# Altium PCB NEO9M.PcbDoc
Units mm, origin at the board's own origin, x right, y up, seen from the top; angles counter-clockwise.
Board outline 46.5 x 32 mm, 4 copper layers (Top Layer, Mid Layer 1, Mid Layer 2, Bottom Layer), stack 1.57 mm thick; 27 components, 26 nets, 108 pads, 18 vias.
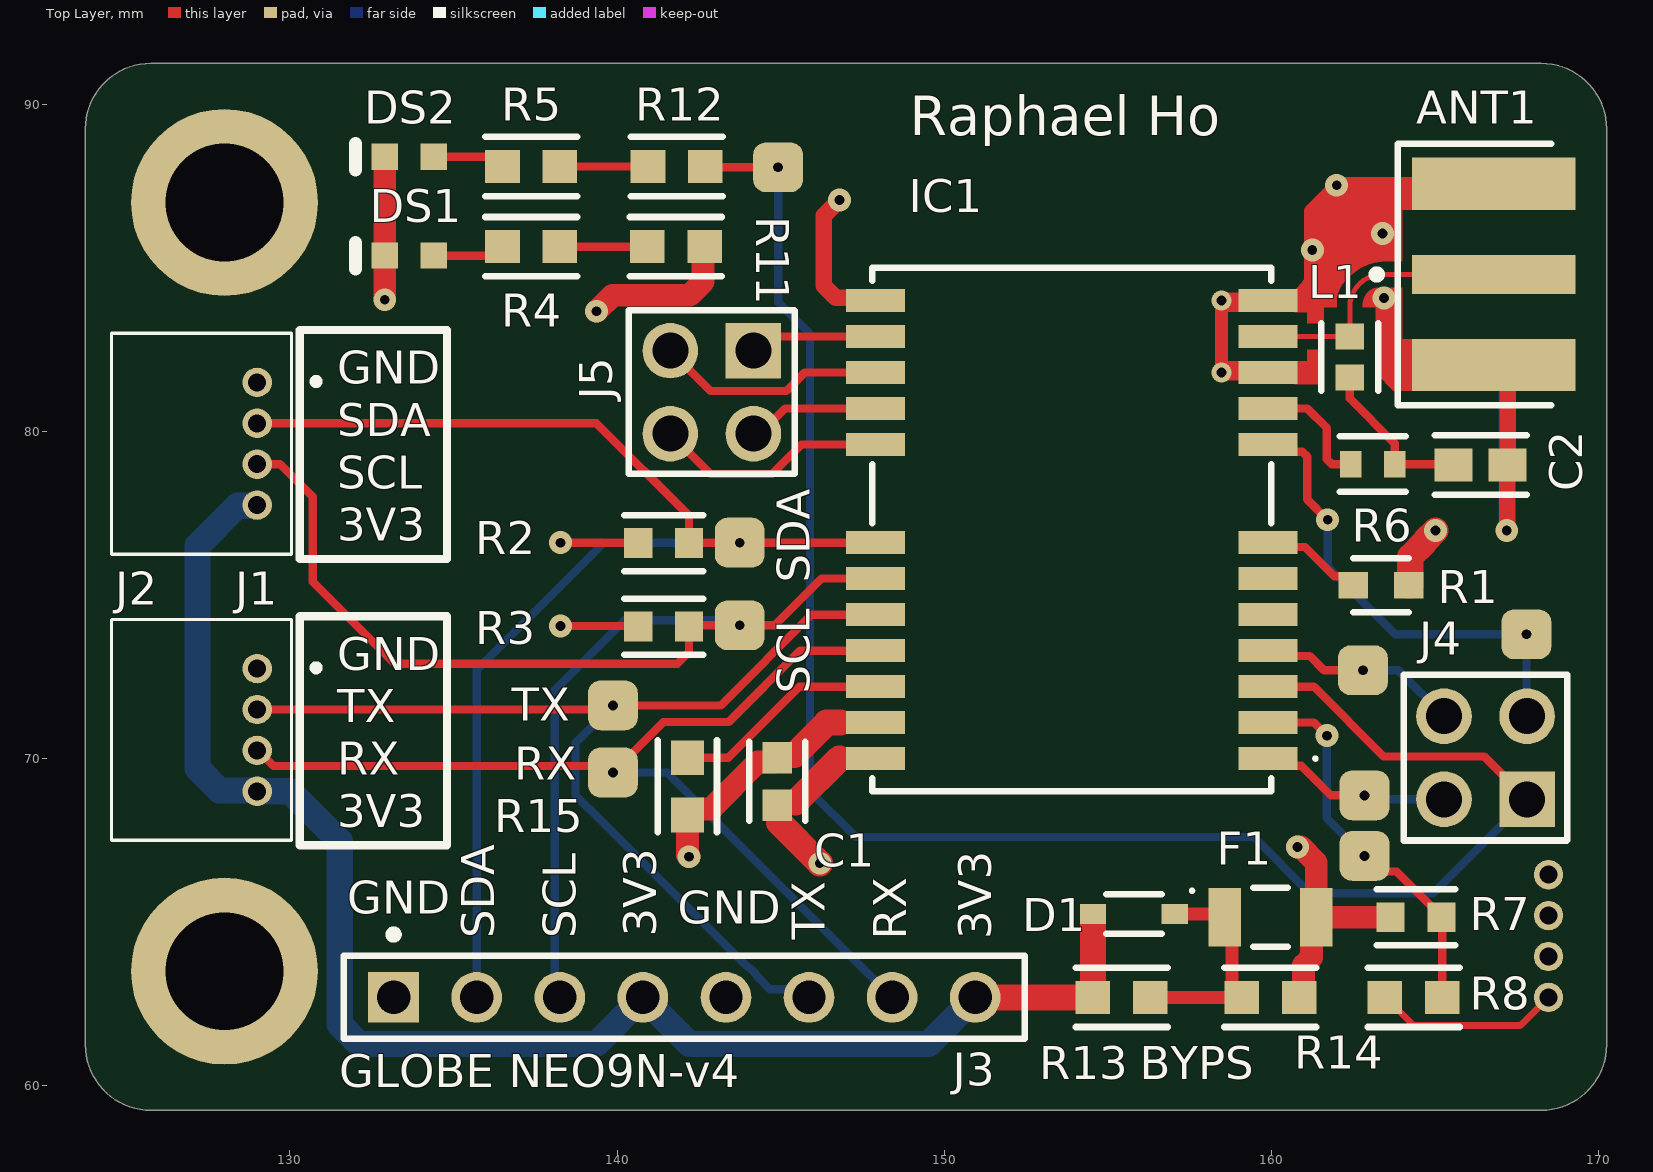
[diagram p0: Top Layer view]
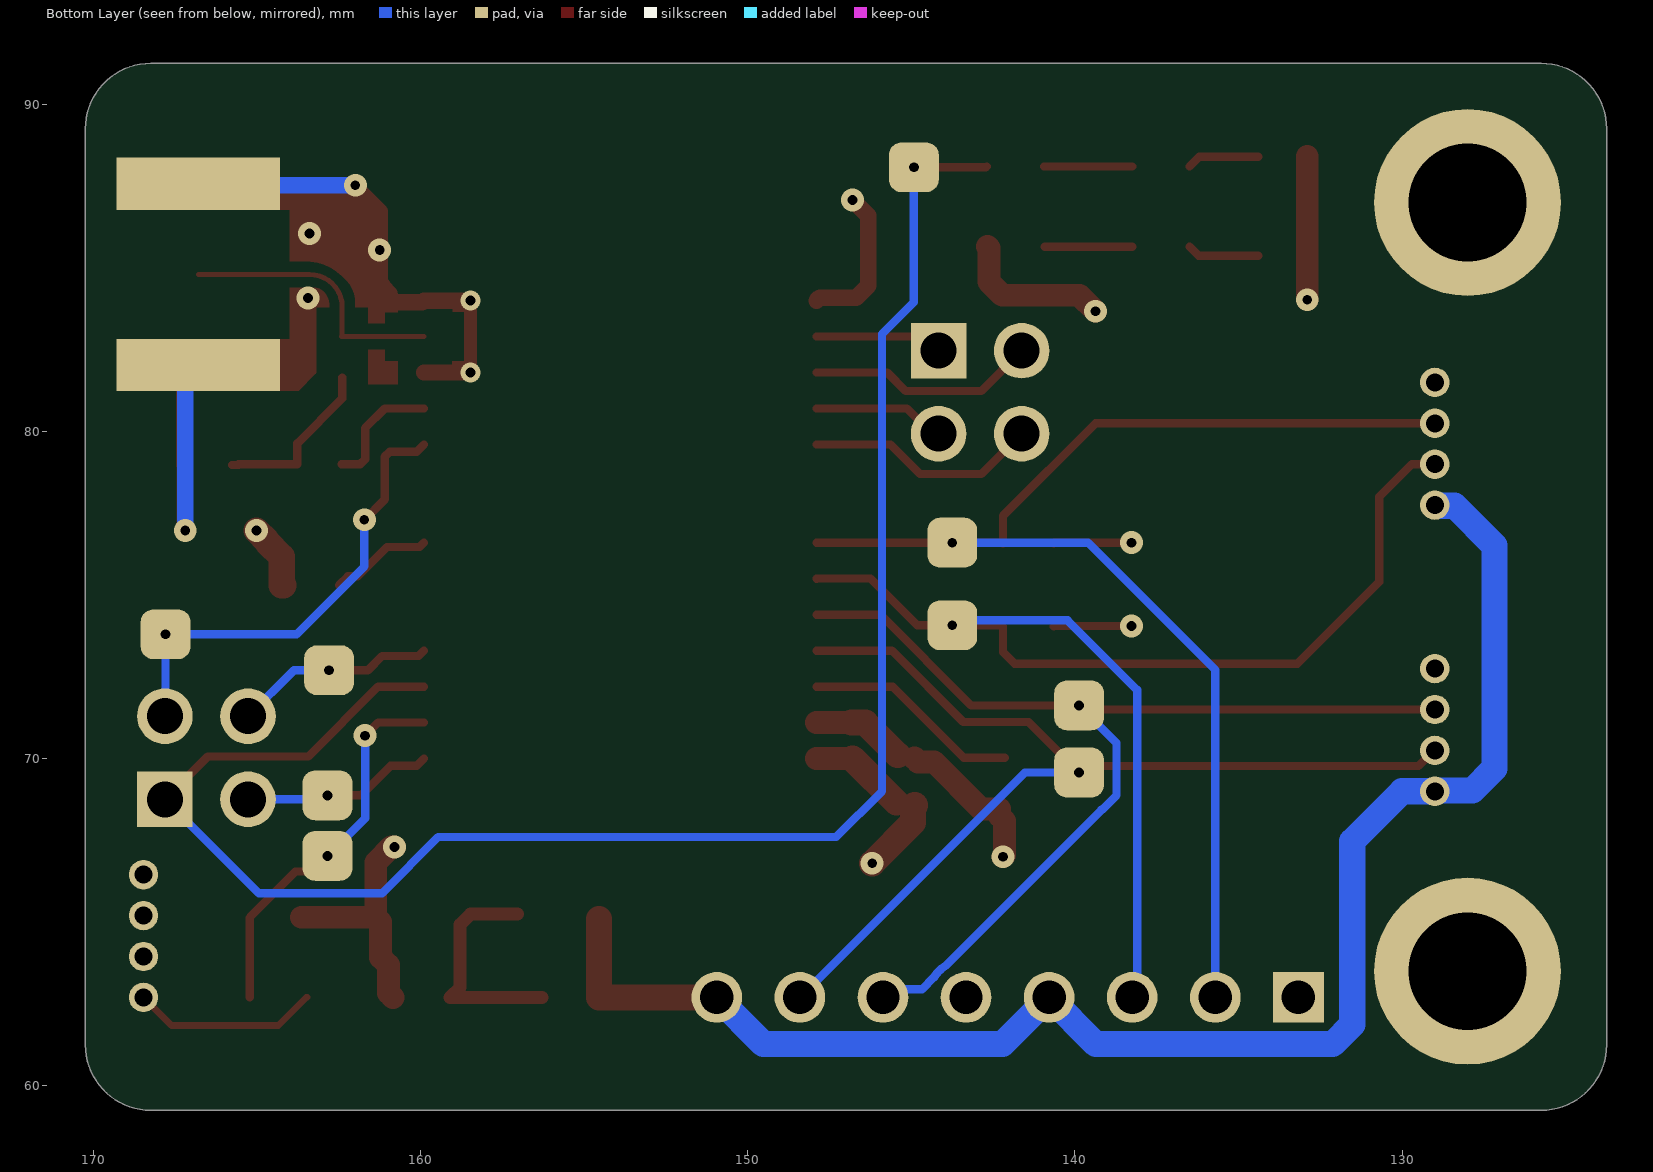
[diagram p1: Bottom Layer view, seen from below]
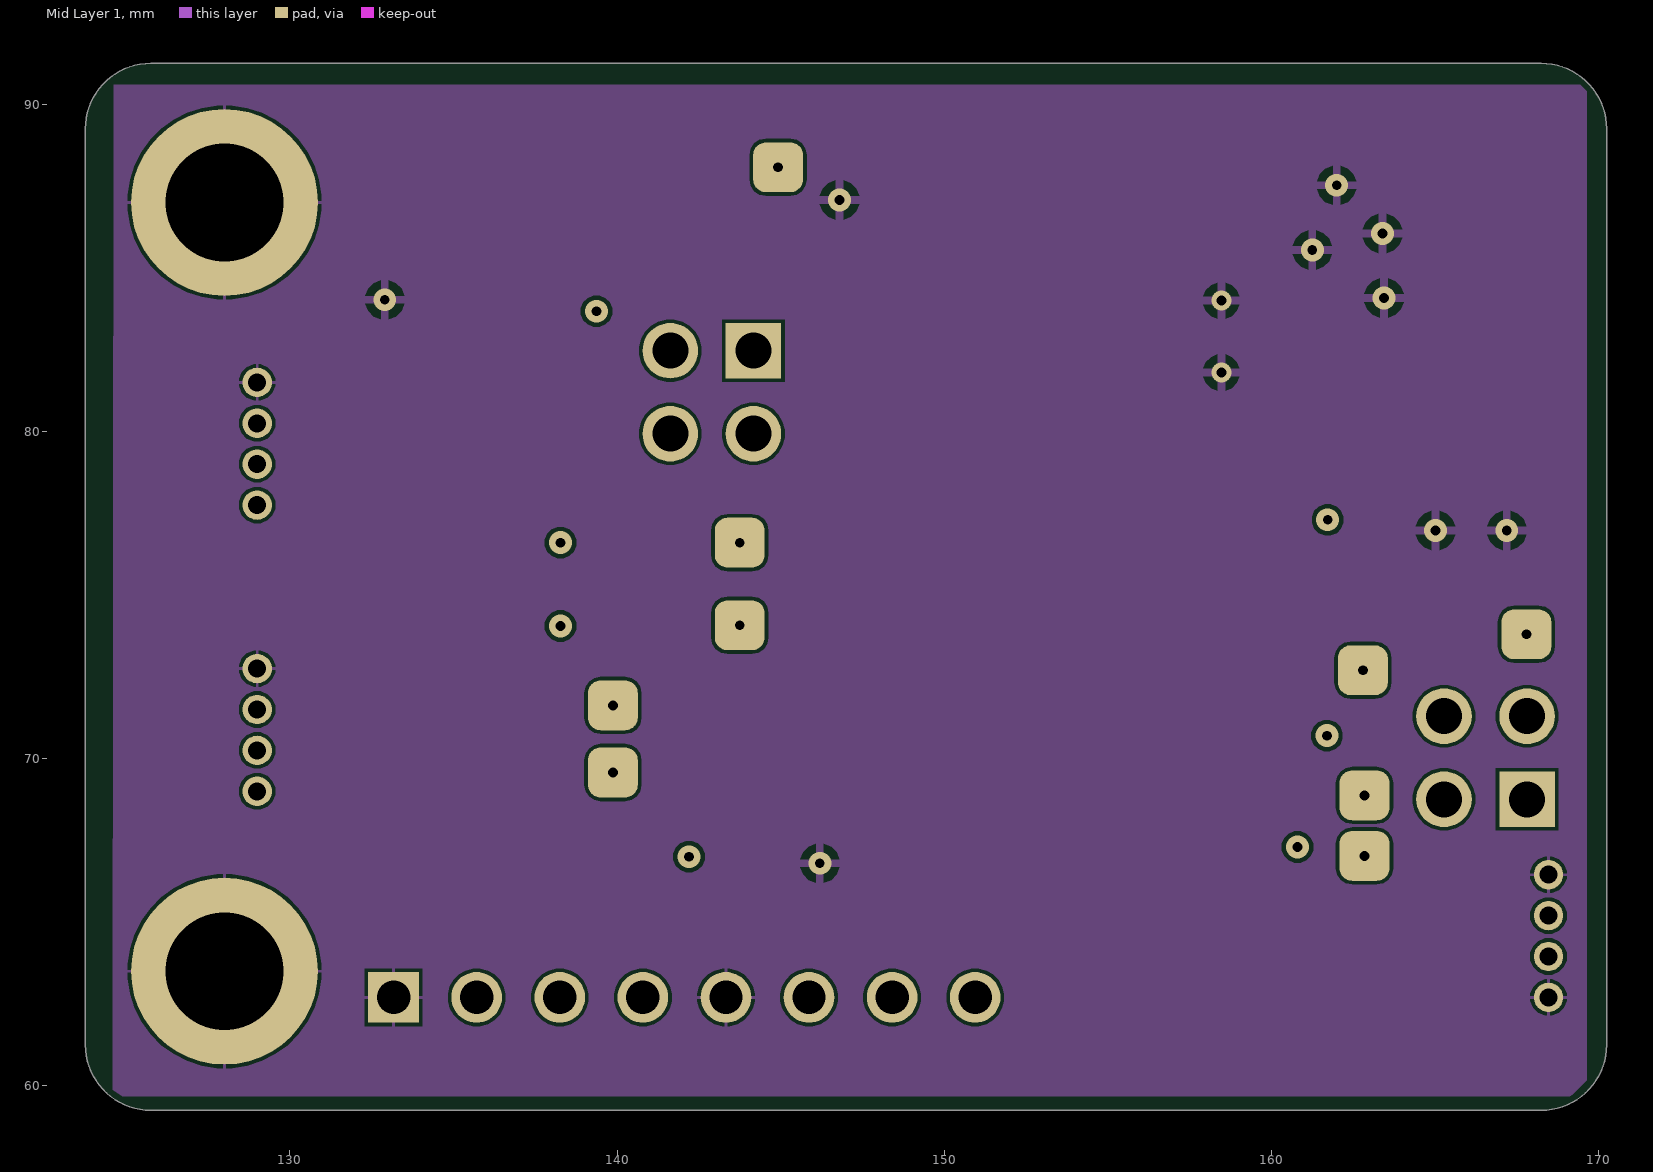
[diagram p2: Mid Layer 1]
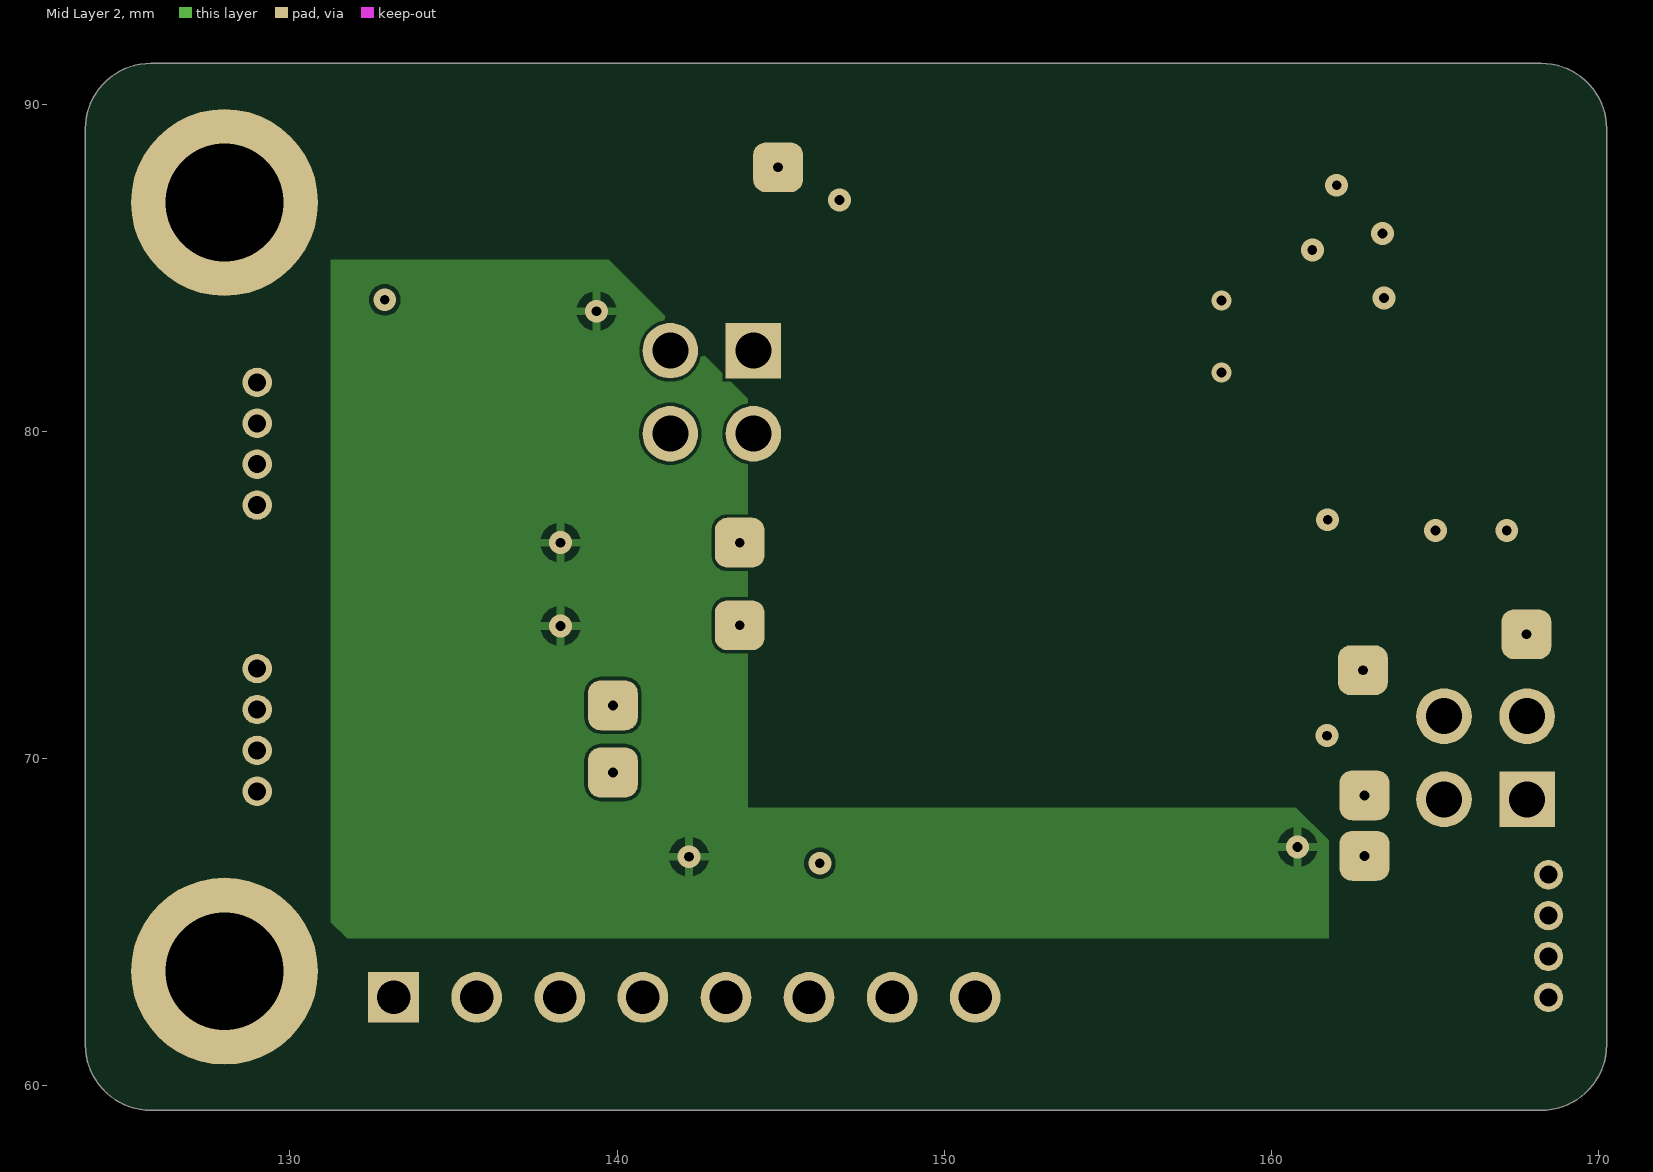
[diagram p3: Mid Layer 2]
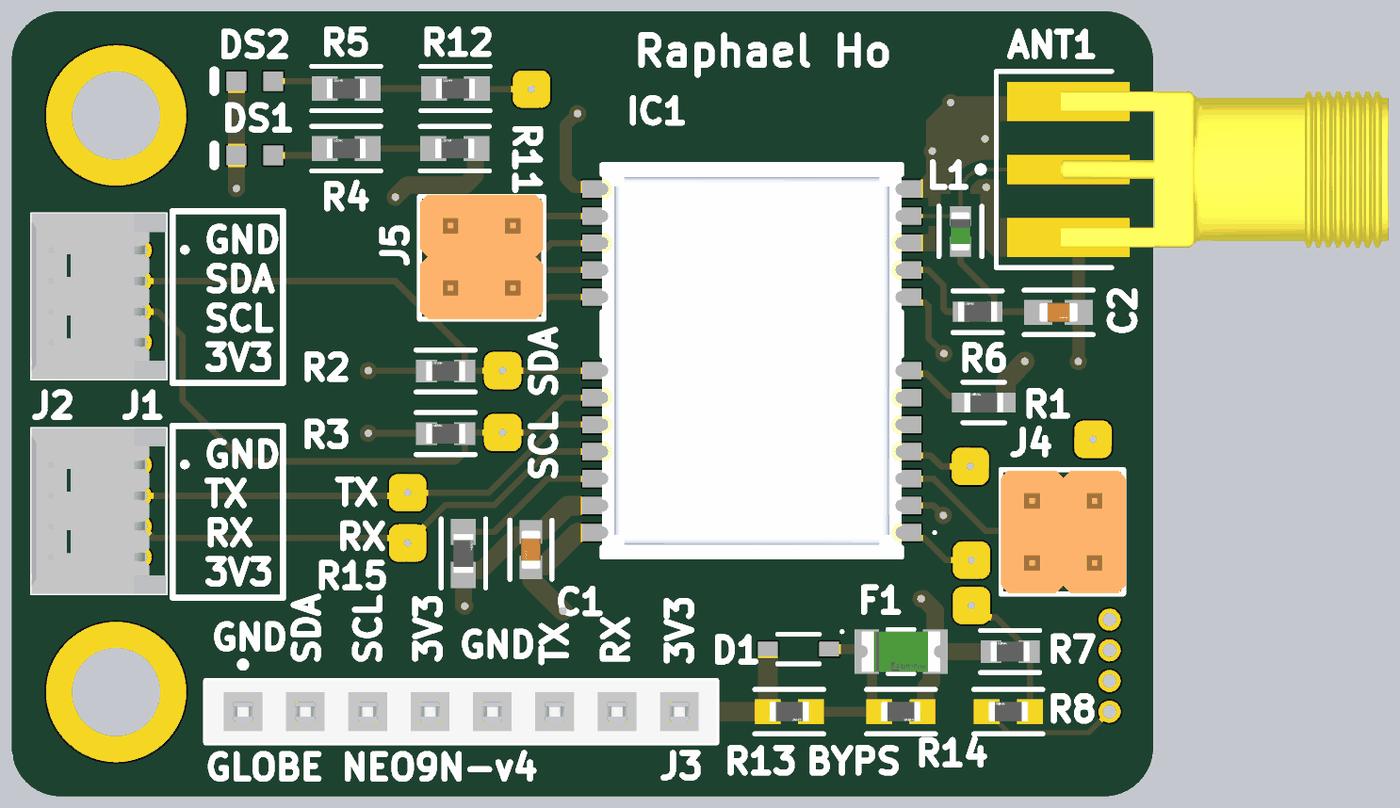
[diagram p4: 3D render of the assembled board from above, using the file's embedded part models]

## Layer stack, top to bottom
Top Solder: solder mask 0.0127, Solder Resist, Dk 3.8
Top Layer: signal copper 0.035
Dielectric 1: prepreg 0.1, 2313, Dk 4.05
Mid Layer 1: signal copper 0.0175
Core: core 1.265, FR-4, Dk 4.5
Mid Layer 2: signal copper 0.0175
Dielectric 2: prepreg 0.1, 2313, Dk 4.05
Bottom Layer: signal copper 0.035
Bottom Solder: solder mask 0.0127, Solder Resist, Dk 3.8

## Board outline
123.75,61.25 123.75,89.25 cw(c125.75,89.25) 125.75,91.25 168.25,91.25 cw(c168.25,89.25) 170.25,89.25 170.25,61.25 cw(c168.25,61.25) 168.25,59.25 125.75,59.25 cw(c125.75,61.25)

## Design rules (kind name [scope] priority, off if disabled: settings)
BoardOutlineClearance [All] p1: gap=0.2 ignorepadtopadclearanceinfootprint=FALSE
Clearance [All] p1: gap=0.102 ignorepadtopadclearanceinfootprint=FALSE except(0.127: Arc-Via Track-Via SMDPad-Via THPad-Via Via-Via Via-Fill Via-Poly Via-Region Via-Text; 0.25: Arc-Hole Track-Hole SMDPad-Hole THPad-Hole Via-Hole Fill-Hole Poly-Hole Region-Hole Text-Hole)
ComponentClearance [All] p1: gap=0.102 collisioncheckmode=3 verticalgap=0.102 showdistances=TRUE
DiffPairsRouting [All] p1: maxlimit=0.102 minlimit=0.102 mostfreqgap=0.102 toplayer_minwidth=0.102 toplayer_maxwidth=1816.048 toplayer_prefwidth=0.102 midlayer1_minwidth=0.102 midlayer1_maxwidth=1816.048 midlayer1_prefwidth=0.102 midlayer2_minwidth=0.102 midlayer2_maxwidth=1816.048 midlayer2_prefwidth=0.102 bottomlayer_minwidth=0.102 bottomlayer_maxwidth=1816.048 bottomlayer_prefwidth=0.102 maxuncoupledlength=12.7
Height [All] p1: minheight=0 maxheight=1816.048 prefheight=12.7
HoleSize [All] p1: absolutevalues=TRUE maxlimit=6.3 minlimit=0.2 maxpercent=80.000 minpercent=20.000
HoleToHoleClearance [All] p1: gap=0.25 allowstackedmicrovias=FALSE
MinimumAnnularRing [All] p1: minimumring=0.076
MinimumSolderMaskSliver [All] p1: minsoldermaskwidth=0
PlaneClearance [All] p1: clearance=0.102
PlaneConnect PlaneConnectPowerPads [InPadClass('PowerPads')] p1: planeconnectstyle=Direct reliefexpansion=0.508 reliefentries=4 reliefconductorwidth=0.254 reliefairgap=0.254
PlaneConnect [All] p2: pad.planeconnectstyle=Relief pad.reliefexpansion=0.3 pad.reliefentries=4 pad.reliefconductorwidth=0.102 pad.reliefairgap=0.102 via.planeconnectstyle=Direct via.reliefexpansion=0.3 via.reliefentries=4 via.reliefconductorwidth=0.127 via.reliefairgap=0.127
PolygonConnect PolygonConnectPowerPads [All vs (InPadClass('PowerPads'))] p1: connectstyle=Direct reliefconductorwidth=0.254 reliefentries=4 polygonreliefangle="90 Angle" airgapwidth=0.254
PolygonConnect [All] p2: thpad.connectstyle=Relief thpad.reliefconductorwidth=0.102 thpad.reliefentries=4 thpad.polygonreliefangle="90 Angle" thpad.airgapwidth=0.102 smdpad.connectstyle=Relief smdpad.reliefconductorwidth=0.102 smdpad.reliefentries=4 smdpad.polygonreliefangle="90 Angle" smdpad.airgapwidth=0.102 via.connectstyle=Direct via.reliefconductorwidth=0.127 via.reliefentries=4 via.polygonreliefangle="90 Angle" via.airgapwidth=0.127
RoutingVias [All] p1: holewidth=0.2 width=0.45 viastyle="Through Hole" minholewidth=0.2 minwidth=0.45 maxholewidth=6.3 maxwidth=6.55
SilkToSilkClearance [All] p1: silktosilkclearance=0
SilkToSolderMaskClearance [IsPad] p1: minsilkscreentomaskgap=0.102 clearancetoexposedcopper=TRUE
SolderMaskExpansion [All] p1: expansion=0.075 istentingtop=FALSE
SupplyNets "Schematic Supply Nets_3" [InNet('+3V3 INT')] p1: voltage=0.000
SupplyNets "Schematic Supply Nets_2" [InNet('GND')] p2: voltage=0.000
SupplyNets "Schematic Supply Nets_1" [InNet('RF-VCC')] p3: voltage=0.000
SupplyNets "Schematic Supply Nets" [InNet('+3V3')] p4: voltage=0.000
Width [All] p1: maxlimit=1816.048 minlimit=0.102 preferedwidth=0.102
20 further rules are at their usual default settings.

## Components (designator, comment, footprint, x,y, rotation, side; value= is the part's Value field where it differs from the comment)
ANT1 "CON-SMA-EDGE-S" FP-CON-SMA-EDGE-S-MFG 174.06,84.8 r270 top locked
C1 "1uF" FP-GCM188-0_1-IPC_B 144.9,69.3 r270 top
C2 "100nF" FP-GCM188-0_1-IPC_A 166.398,78.975 r0 top
D1 "BAT60A" INF-SOD323_V 155.8,65.25 r270 top
DS1 "HSMG-C190" AVAG-HSMX-C190_V 133.65,85.375 r180 top
DS2 "HSMG-C190" AVAG-HSMX-C190_V 133.65,88.4 r180 top
F1 "1206L050YR" FP-1206L050YR-MFG 159.975,65.15 r0 top
IC1 "NEO-M9N-00B" NEOM9N00B 153.9,77 r0 top locked
J1 "53048-0410" 530480410 129,72.75 r90 top locked
J2 "53048-0410" 530480410 129,81.5 r90 top locked
J3 "PPPC081LFBN-RC" SLIN-PPPC081LFBN-RC_V 142.06,62.7 r0 top
J4 "HDR 2x2" HDR_2x2_2.54mm 166.55,70.025 r180 top
J5 "HDR 2x2" HDR_2x2_2.54mm 142.9,81.2 r270 top
L1 "LQG18HH27NJ00D" FP-LQG18HH_00-IPC_C 162.4,82.275 r270 top
R1 "100kR" FP-AC0603-MFG 163.35,75.3 r180 top
R2 "2.2kR" FP-AC0603-IPC_B 141.425,76.585 r180 top
R3 "2.2kR" FP-AC0603-IPC_B 141.427,74.035 r180 top
R4 "1kR" FP-AC0603-IPC_A#1 137.375,85.65 r180 top
R5 "1kR" FP-AC0603-IPC_A#1 137.375,88.1 r180 top
R6 "33R" FP-AC0603-IPC_C 163.1,79 r180 top
R7 "910kR" FP-AC0603-IPC_B 164.425,65.15 r180 top
R8 "0R" FP-AC0603-IPC_A#2 164.35,62.7 r180 top
R11 "0R" FP-AC0603-IPC_A#1 141.8,85.65 r180 top
R12 "0R" FP-AC0603-IPC_A#1 141.825,88.1 r180 top
R13 "0R" FP-AC0603-IPC_A#2 155.425,62.7 r0 top
R14 "0R" FP-AC0603-IPC_A#2 159.975,62.7 r0 top
R15 "0R" FP-AC0603-IPC_A#1 142.15,69.15 r90 top

## Footprints (in the part's own frame and the unit in brackets; to place one, negate y for a bottom-side part, rotate by r counter-clockwise, add the part's x,y. Pads: shape width x height; smd on the part's side, far side on the other; paste and mask are expansions set on the pad)
530480410 [mm]
  round 0.9 hole 0.55: 1(0,0) 2(-1.25,0) 3(-2.5,0) 4(-3.75,0)
  silkscreen extent -5.25,-1.9 1.5,4.45, body extent -5.24,-1.04 1.51,4.45, height 3.39
AVAG-HSMX-C190_V [mm] "SMD, 2-Leads, Body 1.6x0.8mm, Height 0.9mm"
  rect 0.8x0.8 smd: 1(-0.75,0) 2(0.75,0)
  silkscreen extent 1.65,-0.4 1.65,0.4, body extent -0.8,-0.4 0.8,0.4, height 0.9
FP-1206L050YR-MFG [mm]
  rect 1x1.8 smd paste+0 mask+0: 1(-1.4,0) 2(1.4,0)
  silkscreen extent -0.53,-0.9 0.53,0.9, body extent -2,-1 2,1, height 0.25
FP-AC0603-IPC_A#1 [mm]
  rect 1.059x1.012 smd paste+0 mask+0: 1(-0.877,0) 2(0.877,0)
  silkscreen extent -1.41,-0.91 1.41,0.91, body extent -1.91,-1.01 1.91,1.01, height 0.25
FP-AC0603-IPC_A#2 [mm]
  rect 1.059x1.012 smd paste-2539.97 mask+0: 1(-0.877,0) 2(0.877,0)
  silkscreen extent -1.41,-0.91 1.41,0.91, body extent -1.91,-1.01 1.91,1.01, height 0.25
FP-AC0603-IPC_B [mm]
  rect 0.859x0.912 smd paste+0 mask+0: 1(-0.777,0) 2(0.777,0)
  silkscreen extent -1.21,-0.86 1.21,0.86, body extent -1.46,-0.71 1.46,0.71, height 0.25
FP-AC0603-IPC_C [mm]
  rect 0.659x0.812 smd paste+0 mask+0: 1(-0.677,0) 2(0.677,0)
  silkscreen extent -1.01,-0.85 1.01,0.85, body extent -1.11,-0.55 1.11,0.55, height 0.25
FP-AC0603-MFG [mm]
  rect 0.9x0.8 smd paste+0 mask+0: 1(-0.85,0) 2(0.85,0)
  silkscreen extent -0.85,-0.82 0.85,0.82, body extent -1.4,-0.55 1.4,0.55, height 0.25
FP-CON-SMA-EDGE-S-MFG [mm]
  rect 1.2x5 smd paste-2539.97 mask+0: 1(0,-7.26)
  rect 1.6x5 smd paste-2539.97 mask+0: 2(-2.77,-7.26) 3(2.77,-7.26)
  rect 1.6x5 smd far side paste+0 mask+0: 4(-2.77,-7.26) 5(2.77,-7.26)
  silkscreen extent -4,-10.96 4,-5.5, body extent -3.67,-9.86 3.67,4.86, height 0.25
FP-GCM188-0_1-IPC_A [mm]
  rect 1.159x1.012 smd paste+0 mask+0: 1(-0.827,0) 2(0.827,0)
  silkscreen extent -1.41,-0.91 1.41,0.91, body extent -1.91,-1.01 1.91,1.01, height 0.25
FP-GCM188-0_1-IPC_B [mm]
  rect 0.959x0.912 smd paste+0 mask+0: 1(-0.727,0) 2(0.727,0)
  silkscreen extent -1.21,-0.86 1.21,0.86, body extent -1.46,-0.71 1.46,0.71, height 0.25
FP-LQG18HH_00-IPC_C [mm]
  rect 0.806x0.858 smd paste+0 mask+0: 1(-0.626,0) 2(0.626,0)
  silkscreen extent -1.03,-0.87 1.03,0.87, body extent -1.13,-0.58 1.13,0.58, height 0.25
HDR_2x2_2.54mm [mm]
  rect 1.7x1.7 hole 1.1: 1(-1.27,1.27)
  round 1.7 hole 1.1: 2(1.27,1.27) 3(-1.27,-1.27) 4(1.27,-1.27)
  silkscreen extent -2.5,-2.54 2.5,2.53, body extent -2.58,-2.5 2.5,2.5, height 8
INF-SOD323_V [mm] "SOD, 2-Leads, Body 1.7x1.25 mm"
  rect 0.6x0.8 smd: 1(0,1.25) 2(0,-1.25)
  silkscreen extent -0.76,-0.85 0.6,1.83, body extent -0.63,-0.85 0.63,0.85, height 1.1
NEOM9N00B [mm]
  rect 1.8x0.7 smd: 1(6,-7) 2(6,-5.9) 3(6,-4.8) 4(6,-3.7) 5(6,-2.6) 6(6,-1.5) 7(6,-0.4) 8(6,2.6) 9(6,3.7) 10(6,4.8) 11(6,5.9) 12(6,7) 13(-6,7) 14(-6,5.9) 15(-6,4.8) 16(-6,3.7) 17(-6,2.6) 18(-6,-0.4) 19(-6,-1.5) 20(-6,-2.6) 21(-6,-3.7) 22(-6,-4.8) 23(-6,-5.9) 24(-6,-7)
  silkscreen extent -6.1,-8 7.5,8, body extent -6.1,-8 6.1,8, height 2.6
SLIN-PPPC081LFBN-RC_V [mm] "THD, 8-Leads, Body 20.82x2.54mm, Pitch 2.54mm"
  rect 1.55x1.55 hole 1.02: 1(-8.89,0)
  round 1.55 hole 1.02: 2(-6.35,0) 3(-3.81,0) 4(-1.27,0) 5(1.27,0) 6(3.81,0) 7(6.35,0) 8(8.89,0)
  silkscreen extent -10.41,-1.27 10.41,2.04, body extent -10.41,-1.27 10.41,1.27, height 8.5

## Part data
ANT1: library part CMP-204357-000001-1, "CONN SMA JACK STR EDGE MNT", Frequency=18GHz, Manufacturer="RF Solutions Ltd.", Package=CONN_JACK, Automotive=No, Category=Conn, ComponentLink2Description=Datasheet, ComponentLink2URL=https://www.rfsolutions.co.uk/downloads/1498648656DS-CON-EDGE-SMA-4.pdf, Conn Orientation="Right Angle", Contact Material=Gold, Device Class L1=Connectors, Device Class L2="RF / Coaxial Connectors", Device Class L3=unset, Digikey Description="CONN SMA JACK STR EDGE MNT", Footprint Url=https://forum.upverter.com/uploads/default/original/3X/b/e/be75b907af57498775929d6d9099689c472e0307.pdf, Height=6.35mm, Impedance=50Ω, Is Female=yes, Lead Free=Yes, Manufacturer Part Number=CON-SMA-EDGE-S, Number Of Contacts=1, Octopart=https://octopart.com/con-sma-edge-s-rf+solutions-70967450, RoHS=TRUE, Shielding=true
C1: library part CMP-2006-02357-2, "Ceramic Capacitor for Automotive 1uF  ±10% 16VDC X7R 0603 Paper T/R", Case Code (Imperial)=0603, Case Code (Metric)=1608, Dielectric=X7R, Max Operating Temperature=125°C, Min Operating Temperature=-55°C, Package Quantity=1, Ratings=AEC-Q200, Tolerance=10%, Voltage=16V, Capacitance=1uF, Case/Package=0603, Depth=0.8mm, Height=0.8mm, Lead Free="Lead Free", Length=1.6mm, Mount="Surface Mount", Packaging="Tape and Reel", Radiation Hardening=No, REACH SVHC="No SVHC", Termination=SMD/SMT, Thickness=0.035inch, Voltage Rating=16V, Voltage Rating (DC)=16V, Width=0.031inch
C2: library part CMP-2006-02376-2, "CAP CER 0.1UF 50V X7R 0603", Case Code (Imperial)=0603, Case Code (Metric)=1608, Dielectric=X7R, Max Operating Temperature=125°C, Min Operating Temperature=-55°C, Package Quantity=1, Ratings=AEC-Q200, Tolerance=10%, Voltage Rating=50V, Capacitance=100nF, Case/Package=0603, Construction=Flat, Depth=0.8mm, Height=0.8mm, Lead Free="Lead Free", Length=1.6mm, Mount="Surface Mount", Packaging="Tape and Reel", Radiation Hardening=No, RoHS Compliant=Yes, Series=GCM, Termination=SMD/SMT, Thickness=0.035inch, Voltage Rating (DC)=50V, Width=0.031inch
D1: library part CMP-1183-00008-2, "Silicon Schottky Diode, -55 to 85 degC, SOD323, Reel, Green", Manufacturer=Infineon, ComponentLink1Description="Manufacturer URL", ComponentLink1URL=http://www.infineon.com/, ComponentLink2Description=Datasheet, ComponentLink2URL=http://www.infineon.com/dgdl/bat60aseries.pdf?folderId=db3a304313d846880113def5812204a1&fileId=db3a304313d846880113def70c9304a9, ComponentLink3Description="Package Specification", ComponentLink3URL=http://www.infineon.com/dgdl/SOT323-Package_Overview.pdf?folderId=db3a30431936bc4b0119533e1dcb3c92&fileId=db3a30431936bc4b011953495f283cb1, Configuration=Single, CT (max)="35Â pF", Green=TRUE, IF (max)="3,000Â mA", Mounting Technology="Surface Mount", PackageDescription="3-Pin Small Outline Transistor Package, 1.25 x 2 mm Body, 0.65 mm Pitch", PackageReference=SOT323, Packing=Reel, PartNumber=BAT60A, VF (max)="370Â mV", VR (max)="10Â V"
DS1 DS2: library part CMP-1744-00002-1, "Chip LED, Green, 2.2 V, -40 to 85 degC, 2-Pin SMD, RoHS, Tape and Reel", Case\Package=SOIC, Clock Frequency="100 KHz", Frequency="400 KHz", Max Operating Temperature="85 degC", Max Supply Voltage="5.5 V", Min Operating Temperature="-40 degC", Min Supply Voltage="1.7 V", Nominal Supply Current="2 mA", Package Quantity=3000, Access Time="3500 ns", ComponentLink1Description="Manufacturer URL", ComponentLink1URL=http://www.avagotech.com/, ComponentLink2Description=Datasheet, ComponentLink2URL=http://docs.avagotech.com/docs/AV02-0551EN, ComponentLink3Description="Package Specification", ComponentLink3URL=http://www.fairchildsemi.com/dwg/MA/MA03D.pdf, DatasheetVersion=Mar-12, Density="32 kb", Height="1.5 mm", Interface=Serial, Length="5 mm", Max Clock Frequency="100 KHz", Mount="Surface Mount", PackageDescription="2-Pin Surface Mount Device, Body 1.6 x 0.8 mm, Height 0.9 mm", PackageReference=HSMX-C190, Packaging="Tape and Reel", Pins=8, Radiation Hardening=No, REACH SVHC="No SVHC", RoHSCompliant=true, Width="4 mm"
F1: library part CMP-08606-000073-1, "PTC RESET FUSE 6V 500MA 1206", Case Code (Imperial)=1206, Case Code (Metric)=3216, Current Rating=100A, Hold Current=500mA, Max Operating Temperature=85°C, Max Power Dissipation=600mW, Max Voltage Rating (DC)=6V, Min Operating Temperature=-40°C, Package Quantity=4000, Resistance=700mR, Trip Current=1A, Approvals=cULus, Case/Package=1206, Height=0.75mm, Lead Free="Lead Free", Length=3.4mm, Max Current Rating=100A, Operating Supply Voltage=6V, Packaging="Tape and Reel", Power Dissipation=600mW, REACH SVHC="No SVHC", RoHS Compliant=Yes, Series=1206L, Terminal Material=Copper, Termination=SMD/SMT, Time to Trip=0.1s, Voltage Rating=6V, Voltage Rating (DC)=6V, Width=1.8mm, Working Voltage=6V
IC1: "Integrated Circuit", Manufacturer_Name=U-Blox, Mouser Part Number=377-NEO-M9N-00B, Datasheet Link=https://content.u-blox.com/sites/default/files/NEO-M9N-00B_DataSheet_UBX-19014285.pdf, Height=2.6mm, Manufacturer_Part_Number=NEO-M9N-00B, Mouser Price/Stock=https://www.mouser.co.uk/ProductDetail/u-blox/NEO-M9N-00B?qs=DPoM0jnrROVeJ6BHpcwcjw%3D%3D
J1 J2: "Connector", Manufacturer_Name=Molex, Mouser Part Number=538-53048-0410, Datasheet Link=https://www.molex.com/pdm_docs/sd/530480410_sd.pdf, Height=3.7mm, Manufacturer_Part_Number=53048-0410, Mouser Price/Stock=https://www.mouser.co.uk/ProductDetail/Molex/53048-0410?qs=359VwiUTsp2msj5Tobchuw%3D%3D
J3: library part CMP-002-00028-2, "Female Header, Pitch 2.54 mm, 1 x 8 Position, Height 8.5 mm, Tail Length 3.2 mm, -40 to 105 degC, RoHS, Bulk", Manufacturer=Sullins, Max Operating Temperature=105°C, Min Operating Temperature=-40°C, Package Description="Female Header, Pitch 2.54 mm, 1 x 8 Position, Height 8.5 mm, Tail Length 3.2 mm", Case/Package=PPPC081LFBN-RC, Connector Type=Header, Datasheet URL=http://sullinscorp.com/catalogs/101_PAGE114-115_.100_FEMALE_HDR.pdf, Datasheet Version=Jan-15, Gender=Female, Mounting Technology=TH, Package Reference=PPPC081LFBN-RC, RoHS Compliant=Unknown
J4 J5: library part 68602-204HLF, "CONN HEADER VERT 4POS 2.54MM", Color=Black, Current Rating=3A, Flammability Rating="UL94 V-0", Insulation Resistance=5GR, Manufacturer="Amphenol FCI", Max Operating Temperature=125°C, Min Operating Temperature=-65°C, Package Quantity=100, Supplier Part Number 1=609-3369-ND, Voltage Rating=1.5kV, Category="Headers and Wire Housings", ComponentLink1Description=https://datasheet.ciiva.com/728/67996-728884.pdf?src-supplier=Digi-Key, ComponentLink1URL=https://datasheet.ciiva.com/728/67996-728884.pdf?src-supplier=Digi-Key, Connector Type="Male Pin", Contact Gender=Male, Contact Material=Bronze, Contact Mating Length=0.23inch, Contact Plating=Gold,GXT, Contact Post Length=3.81mm, Gender=Male, Housing Material=Thermoplastic, Manufacturer Part Number=68602-204HLF, Mount="Through Hole", Number Of Contacts=4, Number of Positions=4, Number of Rows=2, Packaging=Bulk, Pitch=2.54mm, Pricing 1="1=0,34000, 10=0,31900, 100=0,22320, 500=0,19132, 1000=0,15943, 5000=0,13665, 10000=0,12754 (USD)", Radiation Hardening=No, RoHS=Yes, Row Spacing=0.1inch, Stock 1=3699, Supplier 1=Digi-Key, Termination=Solder
L1: library part CMP-06042-012021-1, "Multilayer type Inductor for Automotive 27nH ±5% 0.54Ω 500mA 0603", Case/Package=0603, DC Resistance (DCR)=4.18mR, Inductance=27nH, Package Quantity=4000, Packaging="Tape and Reel", Termination=SMD/SMT
R1: library part CMP-2000-04857-2, "RES 100kΩ 5.00% 0.1W 0603", Case Code (Imperial)=0603, Case Code (Metric)=1608, Max Operating Temperature=155°C, Max Power Dissipation=100mW, Min Operating Temperature=-55°C, Ratings=AEC-Q200, Resistor Type="Thick Film", Temperature Coefficient=100ppm/°C, Tolerance=5%, Voltage Rating=50V, Case/Package=0603, Construction=Rectangular, Depth=0.8mm, Features="Moisture Resistant", Lead Free="Lead Free", Length=1.6mm, Military Standard=Not, Number of Terminations=2, Packaging="Tape and Reel", Power Rating=100mW, Resistance=100kR, RoHS Compliant=Yes, Series=AC, Termination=SMD/SMT
R2 R3: library part CMP-2000-04866-2, "RES 2.2kΩ 5.00% 0.1W 0603", Case Code (Imperial)=0603, Case Code (Metric)=1608, Max Operating Temperature=155°C, Max Power Dissipation=100mW, Min Operating Temperature=-55°C, Ratings=AEC-Q200, Resistor Type="Thick Film", Temperature Coefficient=100ppm/°C, Tolerance=5%, Voltage Rating=50V, Case/Package=0603, Contact Plating=Tin, Features="Moisture Resistant", Height=0.45mm, Lead Free="Lead Free", Length=1.6mm, Number of Terminations=2, Packaging="Tape and Reel", Power Rating=100mW, Radiation Hardening=No, Resistance=2.2kR, RoHS Compliant=Yes, Series=AC, Termination=SMD/SMT, Width=0.8mm
R4 R5: library part CMP-03412-041970-1, "RES 1kΩ 1.00% 0.1W 0603", Case/Package=0603, Tolerance=1%, Lead Free="Lead Free", Resistance=1kR, RoHS Compliant=Yes
R6: library part CMP-03412-046720-1, "RES 33Ω 0.50% 0.1W 0603", RoHS Compliant=Yes
R7: library part CMP-03412-028406-2, "RES 910KΩ 1.00% 0.1W 0603", Case Code (Imperial)=0603, Case Code (Metric)=1608, Max Operating Temperature=155°C, Max Power Dissipation=100mW, Min Operating Temperature=-55°C, Resistor Type="Thick Film", Temperature Coefficient=100ppm/°C, Tolerance=1%, Voltage Rating=50V, Case/Package=0603, Features="Moisture Resistant", Height=0.022inch, Length=0.063inch, Number of Terminations=2, Packaging="Tape and Reel", Power Rating=100mW, Resistance=910kR, RoHS Compliant=Yes, Series=AC, Termination=SMD/SMT, Width=0.8mm
R8 R11 R12 R13 R14 R15: library part CMP-03412-047235-1, "RES 0Ω 0.00% 0.1W 0603", Case/Package=0603, Resistance=0mR, Tolerance=5%, Lead Free="Lead Free", RoHS Compliant=Yes

## Free pads (board coordinates)
  round 0.9 hole 0.55: 1(168.475,62.7) 2(168.475,63.95) 3(168.475,65.2) 4(168.475,66.45)
  round 5.715 hole 3.6: 14(128,63.5) 14(128,87)
  rrect50% 1.524x1.524 hole 0.3: EXTINT(162.8,72.7) RESET(167.8,73.8) RX(139.875,69.575) SAFEBOOT(162.85,68.875) SCL(143.75,74.075) SDA(143.75,76.6) SELECT(162.85,67.025) TIMEPULSE(144.925,88.075) TX(139.875,71.625)

## Via types
v1: diameter 0.7, hole 0.3, Top Layer to Bottom Layer, tented both sides, 16 vias
v2: diameter 0.61/0.61/0.61/0.61 (per signal layer), hole 0.3, Top Layer to Bottom Layer, tented both sides, 2 vias

## Nets (pads, with @x,y where several pads share a name; then routed paths per layer and width w, separated by ;. In a path a pad name is that pad's centre, name@x,y a point inside that pad or via, vN(x,y) a via of type N, cw(c..) or ccw(c..) an arc to the next point about the centre after c; other vN are vias at no path point)
+3V3: D1.2 J1.4 J2.4 J3.4 J3.8 R13.1 | length 47.4
  Top Layer w0.8: J3.8 R13.1 154.55,62.702 D1.2@154.55,65.1
  Bottom Layer w0.8: J1.4@128.981,69.019 127.856,69.019 127.175,69.7 127.175,76.51 128.395,77.731 128.981,77.731 J2.4 ; J1.4 130,69 131.525,67.475 131.525,65.475 131.525,61.87 132.124,61.271 139.361,61.271 J3.4 142.219,61.271 149.521,61.271 J3.8
"+3V3 INT": C1.1 F1.2 IC1.23 R2.2 R3.2 R7.2 R11.1 R14.2 R15.1 | length 24.6
  Top Layer w0.254: v1(138.275,74.05) 140.635,74.05 R3.2 ; v1(138.275,76.6) 140.633,76.6 R2.2
  Top Layer w0.7: v1(139.375,83.675) 139.865,84.165 142.222,84.165 142.632,84.575 142.632,85.605 R11.1 ; v1(142.2,67) 142.15,67.05 142.15,68.094 142.306,68.25 142.306,68.453 142.861,68.453 144.306,69.897 144.794,69.897 144.9,70.003 C1.1 ; 146.825,71.1 IC1.23 ; v1(160.8,67.3) 160.9,67.3 161.375,66.825 F1.2 ; R14.2 160.986,62.834 160.986,63.686 161.225,63.925 161.225,65 F1.2 ; R7.2 F1.2
  Top Layer w0.8: 145.415,70.106 146.409,71.1 146.825,71.1
EXTINT: IC1.4 J4.4 pad.EXTINT | length 6.2
  Top Layer w0.254: IC1.4 160.064,73.136 161.181,73.136 161.617,72.7 pad.EXTINT
  Bottom Layer w0.254: pad.EXTINT 163.875,72.7 J4.4
GND: ANT1.2 ANT1.3 ANT1.4 ANT1.5 C1.2 C2.2 DS1.2 DS2.2 IC1.10 IC1.12 IC1.13 IC1.24 J1.1 J2.1 J3.1 J3.5 pad.1 pad.4 pad.14 R1.1 R8.2 | length 52.2
  Top Layer w0.2: R8.2 163.497,62.7 164.357,61.84 167.615,61.84 pad.1
  Top Layer w0.4: v2(158.475,81.8) v2(158.475,84)
  Top Layer w0.5: v1(146.8,87.075) 146.325,86.6 146.325,84.449 146.682,84.092 147.808,84.092 IC1.13 ; v2(158.475,81.8) IC1.10 ; v2(158.475,84) IC1.12 159.95,83.95 160.832,83.95 161.255,84.373 v1(161.255,85.549) 161.255,86.726 162,87.471 v1(162,87.525) 166.755,87.525 ANT1.2 ; ANT1.3 167.225,81.605 C2.2 167.213,78.963 v1@167.213,76.975
  Top Layer w0.7: v1(132.9,84.025) DS1.2 DS2.2 ; 146.8,70 IC1.24
  Top Layer w0.8: C1.2 144.956,68.517 144.956,68.044 v1(146.2,66.8) ; 145.453,68.653 146.8,70 ; R1.1 164.25,75.3 164.25,76.168 164.7,76.618 164.7,76.65 v1(165.025,76.975)
  Bottom Layer w0.5: v1(162,87.525) 166.755,87.525 ANT1.4 ; ANT1.5 167.2,81.63 v1@167.2,76.981
  other v1: 167.2,76.975 163.45,84.075 163.4,86.05
LNA_EN: IC1.14 J5.1 | length 3.9
  Top Layer w0.254: J5.1 144.6,82.9 IC1.14
NetC2_1: C2.1 L1.2 R6.1 | length 5.2
  Top Layer w0.254: L1.2 162.4,81.009 163.771,79.638 163.771,79.006 R6.1 C2.1@165.572,79 ; C2.1 C2.1@165.772,78.975
NetD1_1: D1.1 F1.1 R13.2 R14.1 | length 7
  Top Layer w0.4: R13.2 R14.1 158.8,62.998 158.8,64.925 158.475,65.25 D1.1
NetDS1_1: DS1.1 R4.2 | length 2.2
  Top Layer w0.254: DS1.1 136.223,85.375 R4.2
NetDS2_1: DS2.1 R5.2 | length 2.2
  Top Layer w0.254: DS2.1 136.198,88.4 R5.2
NetIC1_7: IC1.7 R1.2 | length 3.1
  Top Layer w0.254: IC1.7 160.032,76.468 161.032,76.468 161.927,75.573 162.227,75.573 R1.2
NetIC1_22: IC1.22 R15.2 | length 6.7
  Top Layer w0.254: R15.2 143.402,70.027 145.575,72.2 IC1.22
NetR4_1: R4.1 R11.2 | length 2.7
  Top Layer w0.254: R4.1 R11.2
NetR5_1: R5.1 R12.2 | length 2.7
  Top Layer w0.254: R5.1 R12.2
PPS: IC1.3 J4.1 pad.TIMEPULSE R12.1 | length 55.5
  Top Layer w0.254: R12.1 142.727,88.075 pad.TIMEPULSE ; IC1.3 161.3,72.2 163.436,70.064 166.511,70.064 J4.1
  Bottom Layer w0.254: pad.TIMEPULSE 144.925,83.954 145.9,82.979 145.9,69 147.3,67.6 159.466,67.6 161.184,65.882 164.947,65.882 J4.1
RESERVED_1: IC1.15 J5.3 | length 7
  Top Layer w0.254: J5.3 142.861,81.239 145.178,81.239 145.739,81.8 IC1.15
RESERVED_2: IC1.16 J5.2 | length 4
  Top Layer w0.254: J5.2 144.371,79.93 145.141,80.7 IC1.16
RESERVED_3: IC1.17 J5.4 | length 7.2
  Top Layer w0.254: J5.4 142.861,78.699 144.739,78.699 145.64,79.6 IC1.17
RESET: IC1.8 J4.3 pad.RESET | length 14.4
  Top Layer w0.254: IC1.8 160.123,79.377 160.951,79.377 161.1,79.228 161.1,77.925 v1(161.725,77.3)
  Bottom Layer w0.254: v1(161.725,77.3) 161.725,75.875 163.8,73.8 pad.RESET 167.8,71.315 J4.3
RF-IN: ANT1.1 IC1.11 L1.1 | length 8.4
  Top Layer w0.154: IC1.11 L1.1 162.4,83.8 cw(c163.4,83.8) 163.4,84.8 ANT1.1
RF-VCC: IC1.9 R6.2 | length 3.8
  Top Layer w0.254: IC1.9 161.1,80.7 161.7,80.1 161.7,79.149 161.849,79 R6.2
RXD/SPI_MOSI: IC1.21 J1.3 J3.7 pad.RX | length 32.1
  Top Layer w0.254: J1.3 129.022,70.25 129.497,69.775 139.675,69.775 139.806,69.644 pad.RX 141.417,71.117 143.416,71.117 145.599,73.3 IC1.21
  Bottom Layer w0.254: pad.RX 141.535,69.575 J3.7
SAFEBOOT: IC1.1 J4.2 pad.SAFEBOOT | length 5.9
  Top Layer w0.254: IC1.1 160.123,69.777 160.923,69.777 161.825,68.875 pad.SAFEBOOT
  Bottom Layer w0.254: pad.SAFEBOOT 162.97,68.755 J4.2
SCL/SPI_SLK: IC1.19 J2.3 J3.3 pad.SCL R3.1 | length 40.5
  Top Layer w0.254: J2.3 129.7,79 130.7,78 130.7,75.4 133.2,72.9 141.85,72.9 142.203,73.253 R3.1 142.243,74.075 pad.SCL 144.821,74.075 146.25,75.505 147.895,75.505 IC1.19
  Bottom Layer w0.254: J3.3 138.1,62.85 138.1,72.1 140.225,74.225 143.6,74.225 pad.SCL
SDA/SPI_CS: IC1.18 J2.2 J3.2 pad.SDA R2.1 | length 40.6
  Top Layer w0.254: J2.2 139.375,80.25 142.202,77.423 R2.1 ; R2.1@142.217,76.6 pad.SDA IC1.18
  Bottom Layer w0.254: J3.2 135.71,72.71 139.6,76.6 pad.SDA
SEL: IC1.2 pad.SELECT R7.1 R8.1 | length 11.7
  Top Layer w0.254: IC1.2 161.3,71.1 v1(161.7,70.7) ; pad.SELECT 163.328,66.547 163.832,66.547 165.202,65.177 R7.1 165.227,65.125 R8.1
  Bottom Layer w0.254: v1(161.7,70.7) 161.7,68.175 pad.SELECT
TXD/SPI_MISO: IC1.20 J1.2 J3.6 pad.TX | length 33.2
  Top Layer w0.254: J1.2@129.121,71.621 J1.2 139.75,71.5 pad.TX 143.175,71.625 145.95,74.4 IC1.20
  Bottom Layer w0.254: pad.TX 138.732,70.482 138.732,68.878 139.178,68.432 139.193,68.432 143.948,63.677 cw(c143.33,62.7) 144.307,63.318 144.677,62.948 145.622,62.948 J3.6
pads on no net: IC1.5 IC1.6

## Polygon pours and split planes (outlines as drawn)
"+3V3 INT" on Mid Layer 2 "+3V3_INT_L03_P004" (solid, pour order 4): 131.25,85.25 131.25,65 131.75,64.5 161.75,64.5 161.75,67.5 160.75,68.5 144,68.5 144,81 139.75,85.25 139.5,85.25
GND on Mid Layer 1 "GND_L02_P005" (solid, pour order 5): 124.613,90.6 169.65,90.6 169.65,60.174 169.151,59.675 124.588,59.675

## Other copper
Top Layer:
  rectangle net GND: 158.55,82.025 159.05,82.15
  rectangle net GND: 158.65,83.65 159.025,83.775
  region net GND: 164,84.4 164,82.825 164.325,82.825 164.325,81.25 163.725,81.25 163.218,81.757 cw(c163.26,81.8) 163.2,81.8 163.2,83.8 162.8,83.8 162.8,83.9 cw(c163.283,83.9) 162.941,84.241 163,84.3 cw(c163.241,84.059) 163.241,84.4 163.5,84.4
  region net GND: 161.255,85.549 162.191,85.549 ccw(c162.191,87.259) 163.4,86.05 164,86.05 164,86.775 164.325,86.775 164.325,87.275 ccw(c163.709,86.641) 163.696,87.525 162,87.525 cw(c161.869,87.525) 161.962,87.433 161.255,86.726
  region net GND: 161.1,83.65 161.1,83.3 161.6,83.3 161.6,83.8 162,83.8 162,83.9 cw(c163.013,83.931) 162.275,84.625 162.4,84.75 cw(c163.531,83.557) 163.577,85.2 164,85.2 164,86.05 163.4,86.05 cw(c162.191,87.259) 162.191,85.549 161.255,85.549 161.255,85.498 cw(c159.703,85.497) 160.8,84.4 ccw(c161.041,84.159) 160.7,84.159 160.7,83.65
  region net GND: 161.1,82.15 161.1,82.5 161.6,82.5 161.6,81.45 160.7,81.45 160.7,82.15

## Silkscreen, mask and mechanical layers (free items; w line width, h text height)
Top Overlay:
  lines w0.254: 130.3,67.35 134.8,67.35 134.8,74.35 130.3,74.35 130.3,67.35 ; 130.3,76.1 134.8,76.1 134.8,83.1 130.3,83.1 130.3,76.1
  text "Raphael Ho" at 148.954,89.054 h1.2
  text "GND" at 131.454,81.454 h1
  text "SDA" at 131.454,79.854 h1
  text "SCL" at 131.454,78.254 h1
  text "3V3" at 131.454,76.654 h1
  text "SDA" at 145.896,75.379 h1 r90
  text "GND" at 131.454,72.704 h1
  text "SCL" at 145.896,71.979 h1 r90
  text "TX" at 136.779,71.154 h1
  text "TX" at 131.454,71.104 h1
  text "RX" at 131.454,69.504 h1
  text "RX" at 136.854,69.354 h1
  text "3V3" at 131.454,67.904 h1
  text "GND" at 131.754,65.254 h1
  text "GND" at 141.854,64.954 h1
  text "3V3" at 141.196,64.554 h1 r90
  text "SDA" at 136.246,64.504 h1 r90
  text "SCL" at 138.746,64.504 h1 r90
  text "3V3" at 151.446,64.479 h1 r90
  text "TX" at 146.346,64.454 h1 r90
  text "RX" at 148.846,64.454 h1 r90
  text "BYPS" at 155.979,60.204 h1
  text "GLOBE NEO9N-v4" at 131.504,59.954 h1
Mechanical 1:
  the board outline again, w0.254